# Altium PCB board.PcbDoc
Units mm, origin at the board's own origin, x right, y up, seen from the top; angles counter-clockwise.
Board outline 40 x 69 mm, 4 copper layers (Top Layer, Ground, Power, Bottom Layer), stack 0.778 mm thick; 96 components, 59 nets, 352 pads, 234 vias.
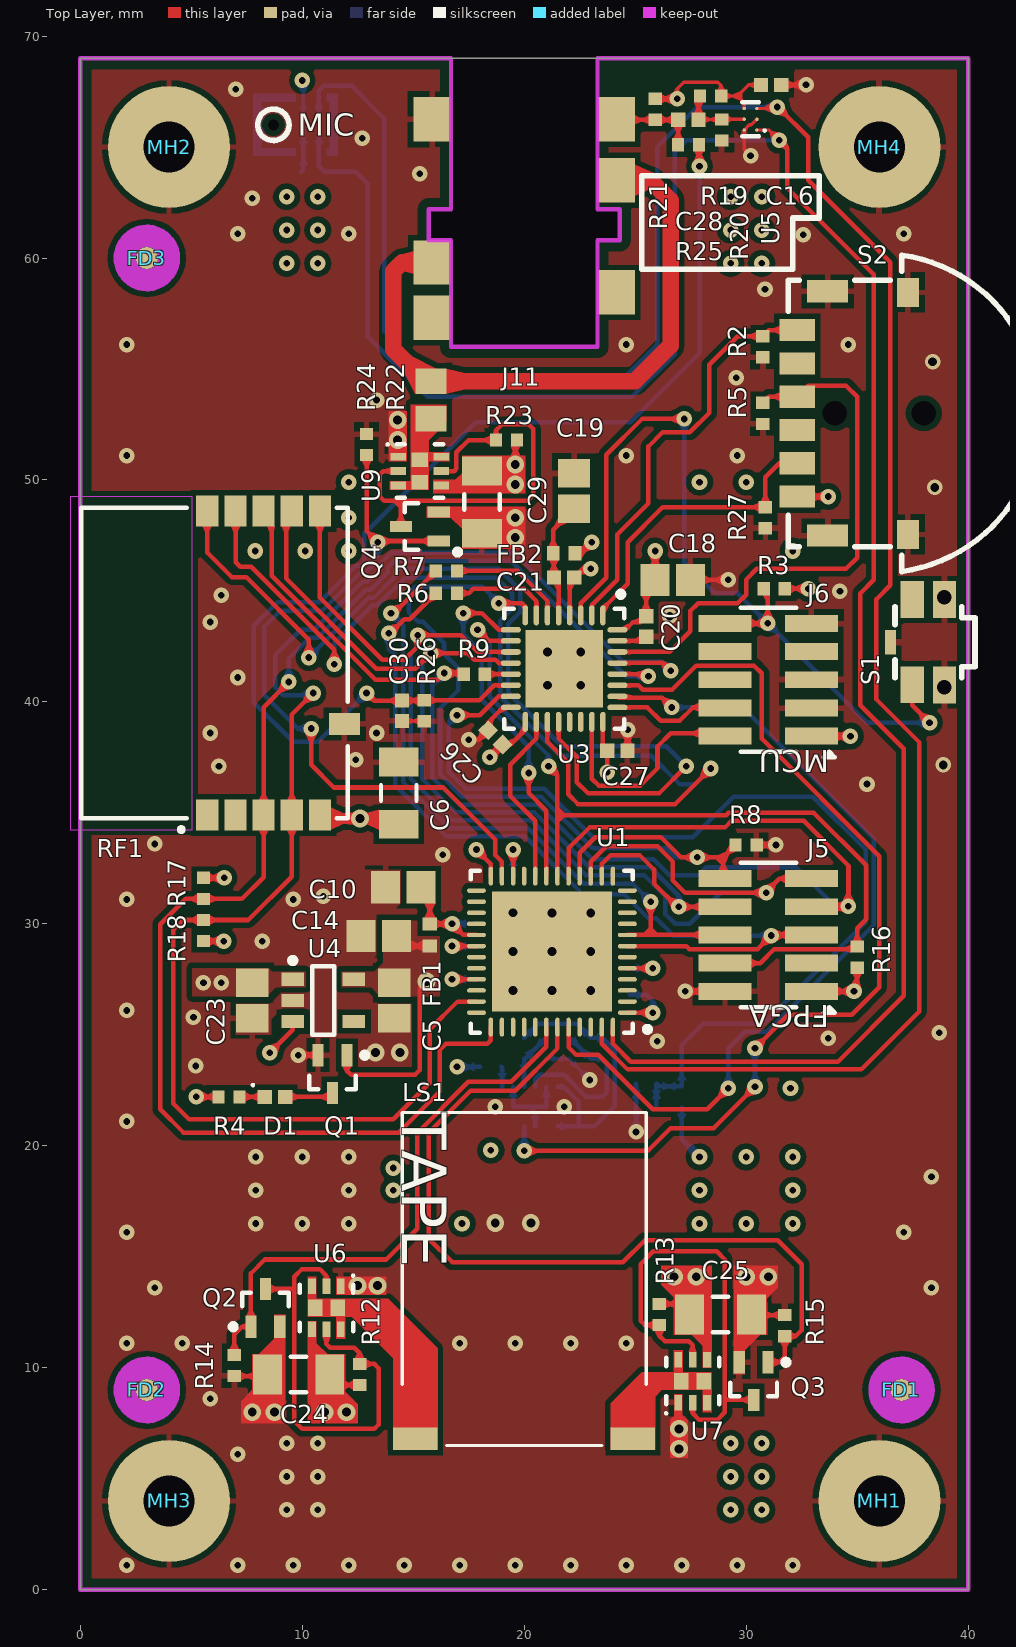
[diagram p0: Top Layer view]
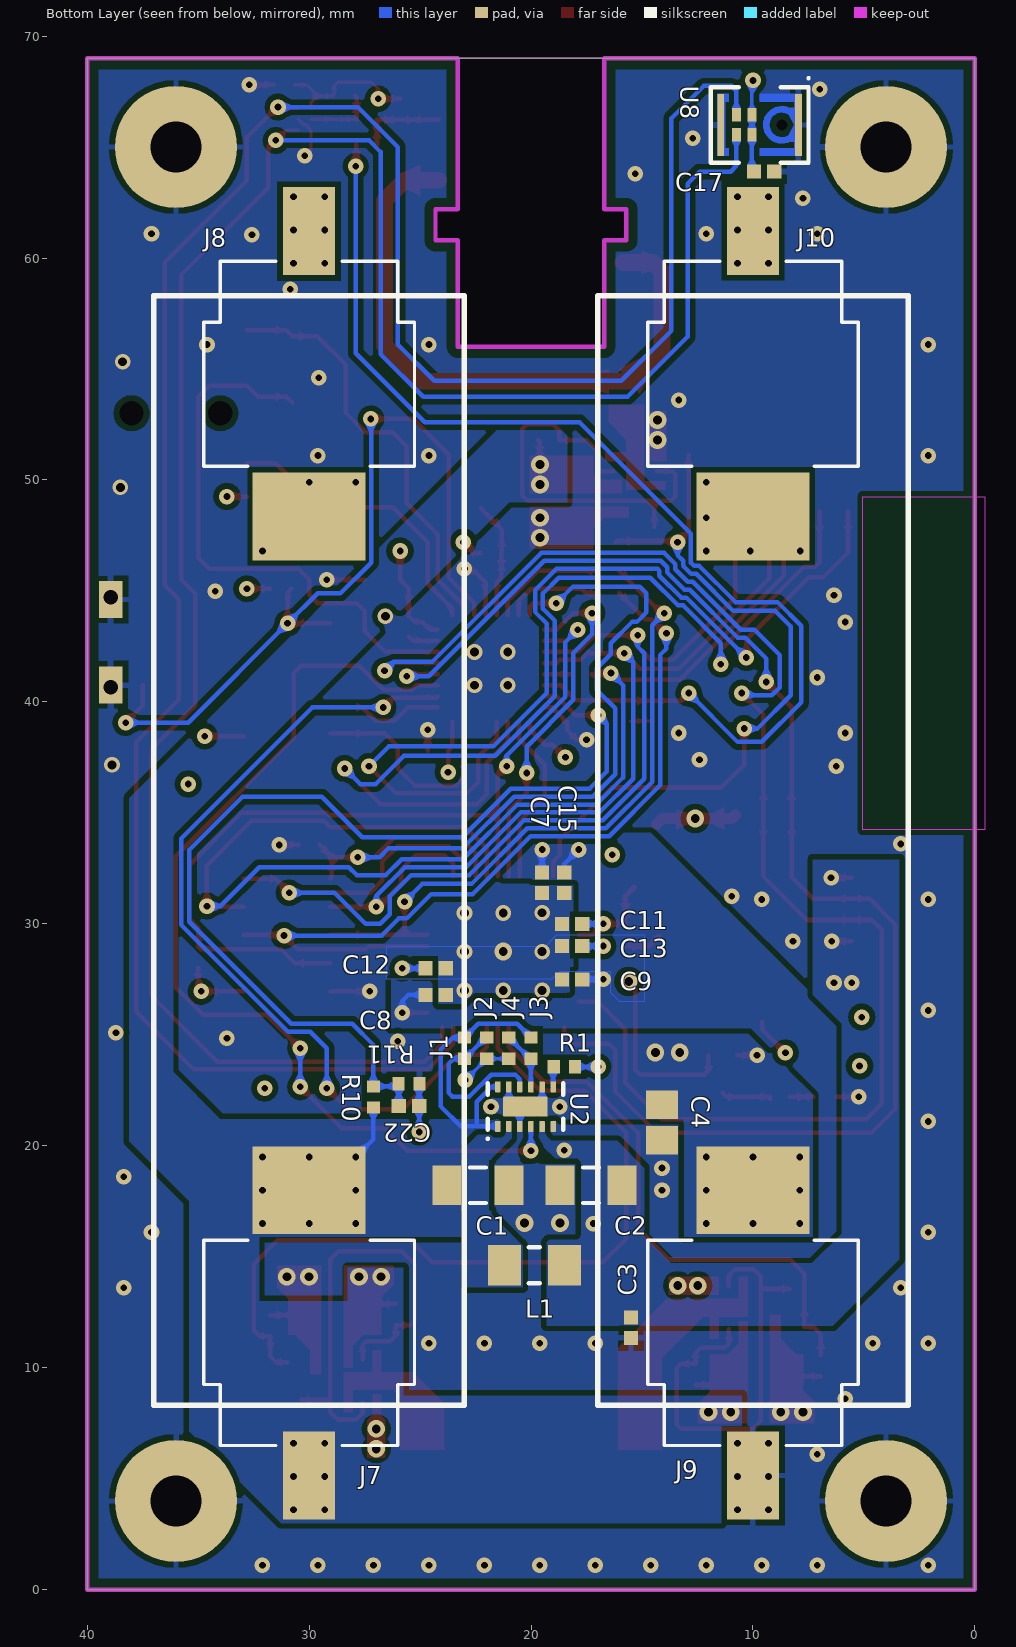
[diagram p1: Bottom Layer view, seen from below]
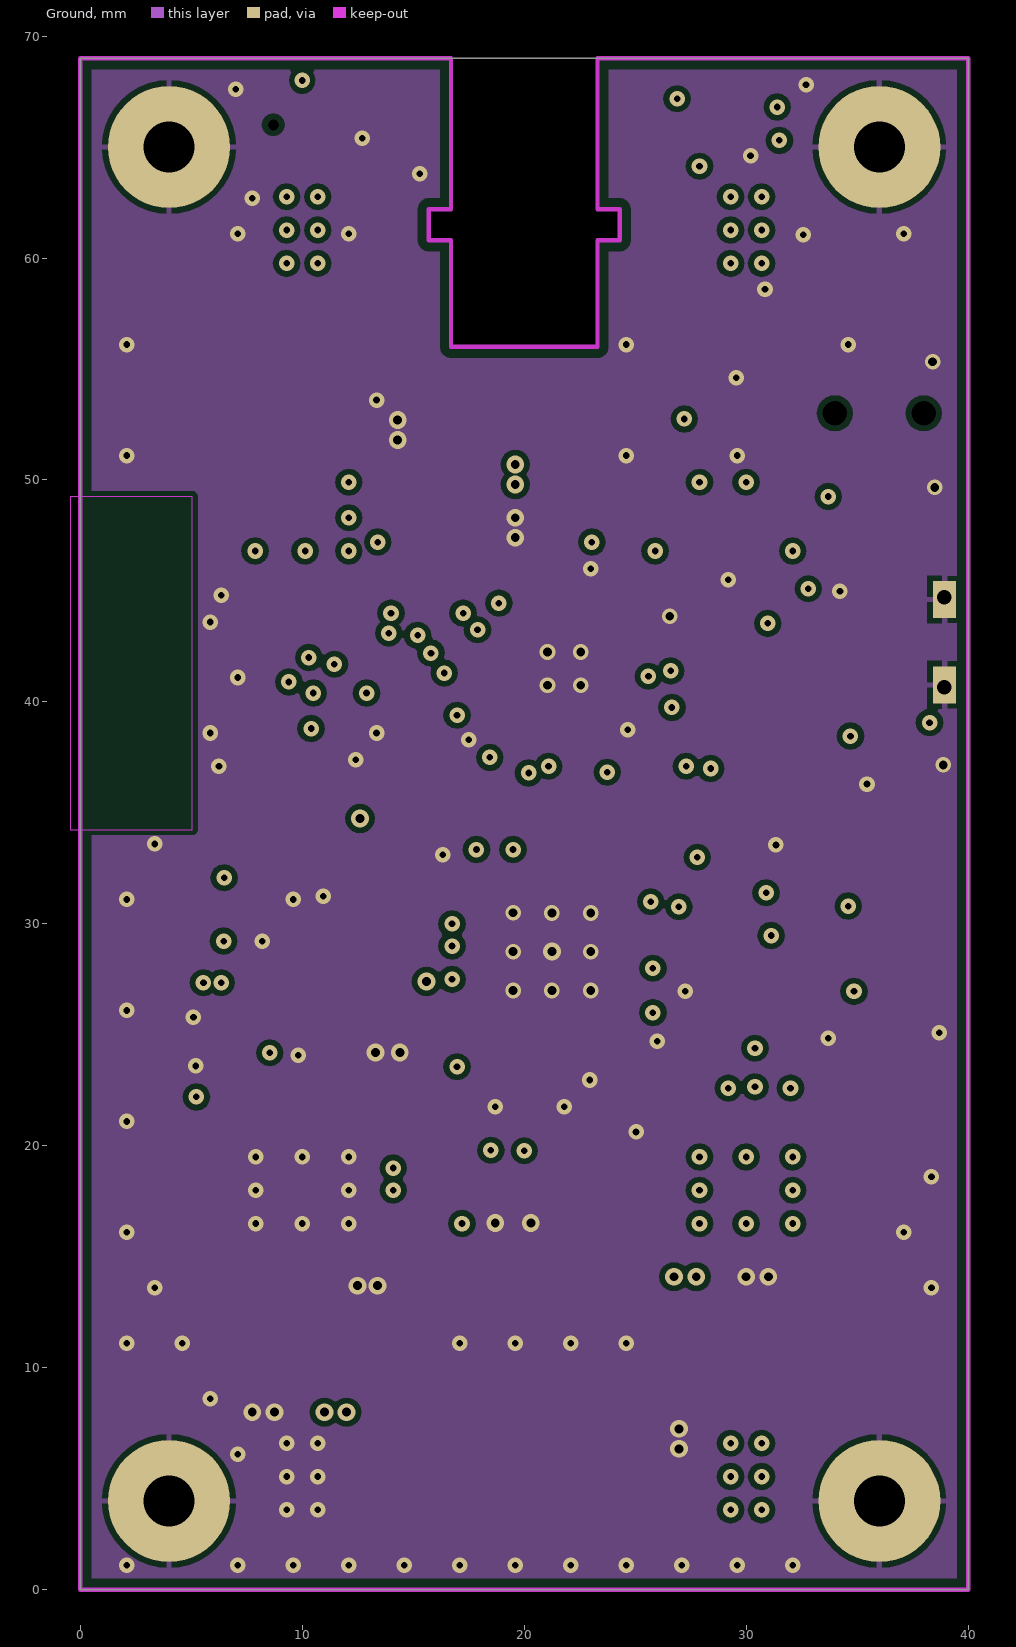
[diagram p2: Ground]
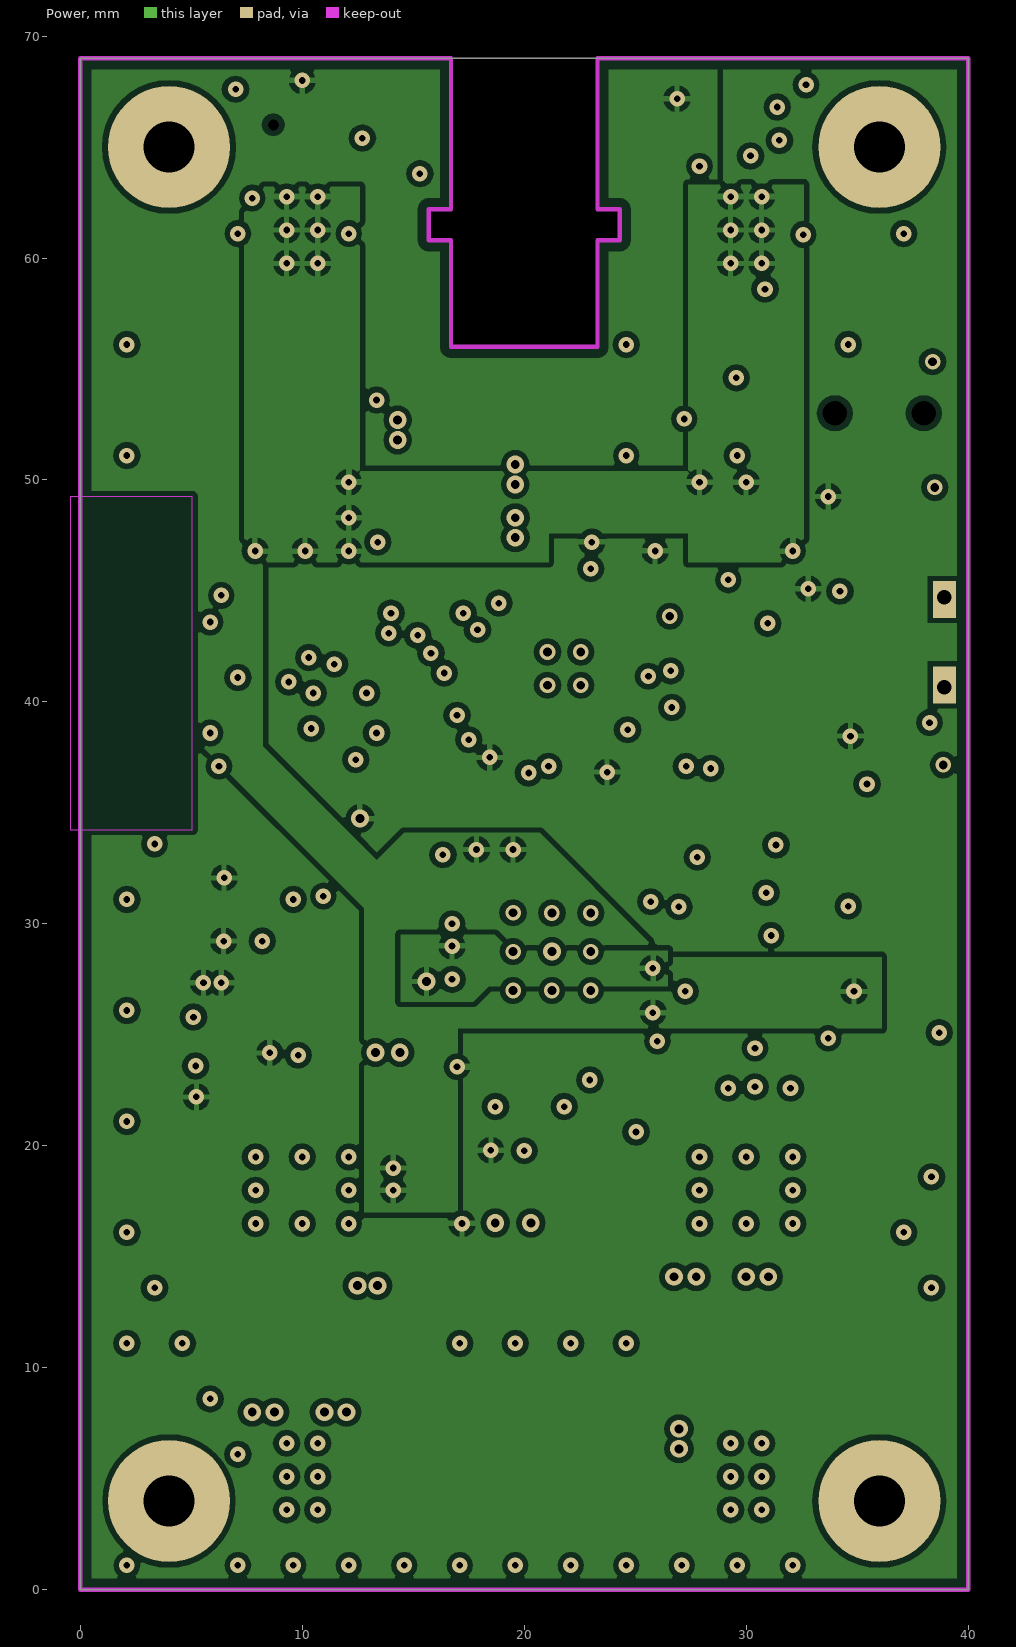
[diagram p3: Power]
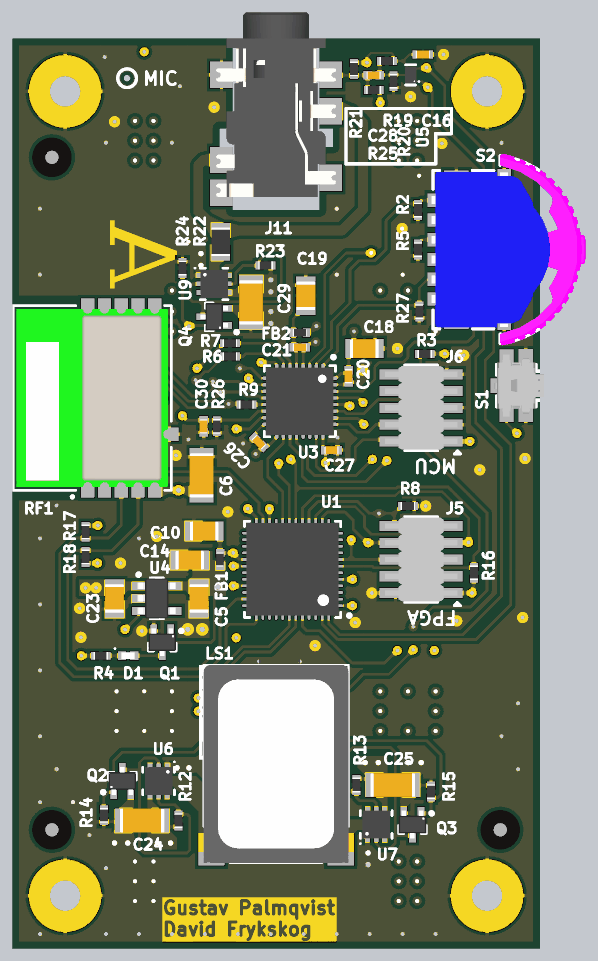
[diagram p4: 3D render of the assembled board from above, using the file's embedded part models]
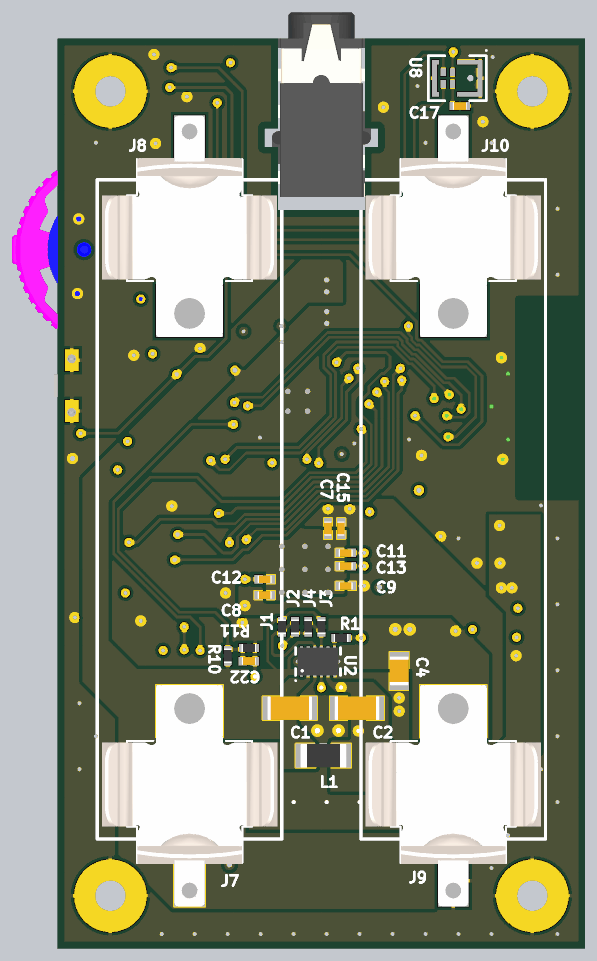
[diagram p5: 3D render of the assembled board from below, using the file's embedded part models]

## Layer stack, top to bottom
Top Solder: solder mask 0.0102, Solder Resist, Dk 3.5
Top Layer: signal copper 0.0356
Dielectric 1: core 0.254, FR-4, Dk 4.2
Ground: signal copper 0.036
Dielectric 3: prepreg 0.127, Dk 4.2
Power: signal copper 0.036
Dielectric 2: core 0.254, Dk 4.2
Bottom Layer: signal copper 0.0356
Bottom Solder: solder mask 0.0102, Solder Resist, Dk 3.5

## Board outline
0,0 0,69 40,69 40,0
cut-out: 106,92
cut-out: 100,94

## Design rules (kind name [scope] priority, off if disabled: settings)
BoardOutlineClearance BoardOutlineClearance_Overlay [OnLayer('Top Overlay') or OnLayer('Bottom Overlay')] p1: gap=0 ignorepadtopadclearanceinfootprint=FALSE
BoardOutlineClearance BoardOutlineClearance_J11 [InComponent('J11')] p2: gap=0 ignorepadtopadclearanceinfootprint=FALSE
BoardOutlineClearance [All] p3: gap=0.508 ignorepadtopadclearanceinfootprint=FALSE
Clearance Clearance_J11 [InComponent('J11') vs IsBoardOutline or IsBoardCutoutRegion] p1: gap=0 ignorepadtopadclearanceinfootprint=FALSE
Clearance "Stitching GND" [IsStitchingVia and InNet('GND') vs (IsVia and (Not IsStitchingVia)) Or IsPad] p2: gap=0.254 ignorepadtopadclearanceinfootprint=FALSE
Clearance Clearance_Polygon [InPolygon] p3: gap=0.254 ignorepadtopadclearanceinfootprint=FALSE
Clearance [All] p4: gap=0.152 ignorepadtopadclearanceinfootprint=FALSE
ComponentClearance ComponentClearance_bat [InComponent('J9') or InComponent('J10') or InComponent('J7') or InComponent('J8')] p1: gap=-5 collisioncheckmode=3 verticalgap=-5 showdistances=FALSE
ComponentClearance [All] p2: gap=0.254 collisioncheckmode=3 verticalgap=0.254 showdistances=FALSE
DiffPairsRouting [All] p1: maxlimit=0.254 minlimit=0.152 mostfreqgap=0.203 toplayer_minwidth=0.152 toplayer_maxwidth=0.381 toplayer_prefwidth=0.152 midlayer1_minwidth=0.152 midlayer1_maxwidth=0.381 midlayer1_prefwidth=0.152 midlayer2_minwidth=0.152 midlayer2_maxwidth=0.381 midlayer2_prefwidth=0.152 bottomlayer_minwidth=0.152 bottomlayer_maxwidth=0.381 bottomlayer_prefwidth=0.152 maxuncoupledlength=12.7
MinimumSolderMaskSliver [All] p1: minsoldermaskwidth=0
PolygonConnect PolygonConnect_1 [IsVia and InNet('GND') vs IsPolygon] p1: connectstyle=Direct reliefconductorwidth=0.254 reliefentries=4 polygonreliefangle="90 Angle" airgapwidth=0.254
PolygonConnect PolygonConnect_Power [InPolygonClass('Power')] p2: thpad.connectstyle=Relief thpad.reliefconductorwidth=0.254 thpad.reliefentries=4 thpad.polygonreliefangle="90 Angle" thpad.airgapwidth=0.254 smdpad.connectstyle=Direct smdpad.reliefconductorwidth=0.254 smdpad.reliefentries=4 smdpad.polygonreliefangle="90 Angle" smdpad.airgapwidth=0.254 via.connectstyle=Direct via.reliefconductorwidth=0.254 via.reliefentries=4 via.polygonreliefangle="90 Angle" via.airgapwidth=0.254
PolygonConnect [All] p3: connectstyle=Relief reliefconductorwidth=0.254 reliefentries=4 polygonreliefangle="90 Angle" airgapwidth=0.254
RoutingVias [All] p1: holewidth=0.3 width=0.7 viastyle="Through Hole" minholewidth=0.3 minwidth=0.6 maxholewidth=1 maxwidth=5
ShortCircuit ShortCircuit_J11 [InComponent('J11') vs IsBoardCutoutRegion] p1: allowed=TRUE
ShortCircuit [All] p2: allowed=FALSE
SilkToSilkClearance [All] p1: silktosilkclearance=0.1
SilkToSolderMaskClearance [IsPad] p1: minsilkscreentomaskgap=0 clearancetoexposedcopper=TRUE
SolderMaskExpansion [All] p1: expansion=0.075
Width [All] p1: maxlimit=2.54 minlimit=0.152 preferedwidth=0.203
24 further rules are at their usual default settings.

## Classes and differential pairs
polygon class Power: GND_L01_P098 GND_L04_P066 GND_L04_P078 GND_L04_P080 NETL1_1_L04_P038 VAUX_1V8_L04_P086 VIN_4V2_L04_P064 VSYS_1V2_L01_P088 VSYS_1V8_L01_P090 VSYS_1V8_L04_P082
component class RADIO: C6 R17 R18 RF1
component class POWER: C1 C2 C3 C4 C5 C22 C23 D1 FD1 FD2 FD3 J1 J2 J3 J4 J7 J8 J9 J10 L1 MH1 MH2 MH3 MH4 Q1 R1 R4 R10 R11 U2 U4
component class MCU: C18 C19 C20 C21 C26 C27 FB2 J6 R2 R3 R5 R9 R27 S1 S2 U3
component class FPGA: C7 C8 C9 C10 C11 C12 C13 C14 C15 FB1 J5 R6 R7 R8 R16 U1
component class AUDIO: C16 C17 C24 C25 C28 C29 C30 J11 LS1 Q2 Q3 Q4 R12 R13 R14 R15 R19 R20 R21 R22 R23 R24 R25 R26 U5 U6 U7 U8 U9
differential pair USB: +USB_P -USB_N

## Components (designator, comment, footprint, x,y, rotation, side; value= is the part's Value field where it differs from the comment)
C1 "cap" CAPC3216X14N 22.4,18.225 r0 bottom value=10u
C2 "cap" CAPC3216X14N 17.3,18.225 r180 bottom value=10u
C3 "cap" CAPC1005X06N 15.5,11.8 r90 bottom value=100n
C4 "cap" CAPC2012X11N 14.1,21.05 r270 bottom value=1u
C5 "cap" CAPC2012X11N 14.15,26.55 r90 top value=1u
C6 "cap" CAPC3216X14N 14.349,35.888 r90 top value=10u
C7 "cap" CAPC1005X06N 19.5,31.85 r90 bottom value=100n
C8 "cap" CAPC1005X06N 24.3,26.8 r0 bottom value=100n
C9 "cap" CAPC1005X06N 18.15,27.5 r180 bottom value=100n
C10 "cap" CAPC2012X11N 14.55,31.65 r0 top value=4u7
C11 "cap" CAPC1005X06N 18.15,30 r180 bottom value=100n
C12 "cap" CAPC1005X06N 24.3,28 r180 bottom value=100n
C13 "cap" CAPC1005X06N 18.15,29 r0 bottom value=100n
C14 "cap" CAPC2012X11N 13.45,29.45 r0 top value=4u7
C15 "cap" CAPC1005X06N 18.5,31.85 r90 bottom value=100n
C16 "cap" CAPC1005X06N 31.127,67.8 r180 top value=100n
C17 "cap" CAPC1005X06N 9.5,63.894 r0 bottom value=100n
C18 "cap" CAPC2012X11N 26.7,45.5 r180 top value=4u7
C19 "cap" CAPC2012X11N 22.25,49.5 r270 top value=1u
C20 "cap" CAPC1005X06N 25.5,43.4 r270 top value=100n
C21 "cap" CAPC1005X06N 21.8,45.6 r0 top value=100n
C22 "cap" CAPC1005X06N 25.5,21.8 r0 bottom value=100n
C23 "cap" CAPC2012X11N 7.75,26.55 r90 top value=1u
C24 "cap" CAPC3216X14N 9.84,9.7 r180 top value=1u
C25 "cap" CAPC3216X14N 28.842,12.4 r180 top value=1u
C26 "cap" CAPC1005X06N 18.7,38.4 r135 top value=100n
C27 "cap" CAPC1005X06N 24.2,37.8 r0 top value=100n
C28 "cap" CAPC1005X06N 27.4,66.225 r180 top value=100n
C29 "cap" CAPC3216X14N 18.1,49 r90 top value=1u
C30 "cap" CAPC1005X06N 14.5,39.6 r90 top value=10n
D1 "led" CAPCP1005X06N 8.772,22.204 r0 top value=RED
FB1 "ferrite" INDC1005X06N 15.75,29.5 r90 top value=100R
FB2 "ferrite" INDC1005X06N 21.8,46.7 r0 top value=100R
FD1 "Fiducial" FIDUCIAL_1_3 37,9 r0 top
FD2 "Fiducial" FIDUCIAL_1_3 3,9 r0 top
FD3 "Fiducial" FIDUCIAL_1_3 3,60 r0 top
J1 "res" RESC1005X04N 23,24.4 r90 bottom value=0R
J2 "res" RESC1005X04N 22,24.4 r90 bottom value=0R
J3 "res" RESC1005X04N 20,24.4 r90 bottom value=0R
J4 "res" RESC1005X04N 21,24.4 r90 bottom value=0R
J5 "iCE40 Prog" hdr_2x5_50mil 31,29.5 r90 top
J6 "SWD" hdr_2x5_50mil 31,41 r90 top
J7 "53" ke53 30,18 r270 bottom locked
J8 "53" ke53 30,48.36 r90 bottom locked
J9 "53" ke53 10,18 r270 bottom locked
J10 "53" ke53 10,48.36 r90 bottom locked
J11 "SJ-43504-SMT-TR" SJ-43504-SMT-TR 20.004,69 r270 top locked
L1 "ind" INDC3216X20N 19.85,14.625 r180 bottom value=100u
LS1 "CMS-15113-078S" cms-15113-078s 20,14 r0 top
MH1 "M2" mount_m2l 36,4 r0 top
MH2 "M2" mount_m2l 4,65 r0 top locked
MH3 "M2" mount_m2l 4,4 r0 top
MH4 "M2" mount_m2l 36,65 r0 top locked
Q1 "RU1J002YN" SOTFL65P210X105-3N 11.363,23.233 r270 top
Q2 "RU1J002YN" SOTFL65P210X105-3N 8.34,12.7 r90 top
Q3 "RU1J002YN" SOTFL65P210X105-3N 30.342,9.4 r270 top
Q4 "RU1J002YN" SOTFL65P210X105-3N 15.3,47.9 r180 top
R1 "res" RESC1005X04N 18.5,23.563 r180 bottom value=10K
R2 "res" RESC1005X04N 30.75,56 r90 top value=47K
R3 "res" RESC1005X04N 31.27,45.1 r0 top value=47K
R4 "res" RESC1005X04N 6.705,22.204 r180 top value=1K
R5 "res" RESC1005X04N 30.75,53 r90 top value=47K
R6 "res" RESC1005X04N 16.496,44.9 r0 top value=1K
R7 "res" RESC1005X04N 16.496,45.9 r0 top value=1K
R8 "res" RESC1005X04N 30,33.556 r180 top value=47K
R9 "res" RESC1005X04N 17.75,41.25 r180 top value=10K
R10 "res" RESC1005X04N 27.1,22.2 r270 bottom value=270K
R11 "res" RESC1005X04N 25.5,22.8 r0 bottom value=100K
R12 "res" RESC1005X04N 12.59,9.7 r270 top value=1K
R13 "res" RESC1005X04N 26.092,12.4 r90 top value=1K
R14 "res" RESC1005X04N 6.94,10.1 r90 top value=10K
R15 "res" RESC1005X04N 31.742,11.9 r270 top value=10K
R16 "res" RESC1005X04N 35,28.5 r270 top value=47K
R17 "res" RESC1005X04N 5.55,31.6 r90 top value=10K
R18 "res" RESC1005X04N 5.55,29.7 r270 top value=10K
R19 "res" RESC1005X04N 28.4,67.3 r0 top value=1M2
R20 "res" RESC1005X04N 28.9,65.765 r90 top value=100K
R21 "res" RESC1005X04N 25.9,66.7 r270 top value=2K2
R22 "res" RESC2012X06N 15.8,53.6 r90 top value=10R
R23 "res" RESC1005X04N 19.2,51.8 r0 top value=1K
R24 "res" RESC1005X04N 12.9,51.6 r270 top value=10K
R25 "res" RESC1005X04N 27.4,65.1 r0 top value=220K
R26 "res" RESC1005X04N 15.5,39.6 r270 top value=390K
R27 "res" RESC1005X04N 30.866,48.3 r90 top value=47K
RF1 "SPSGRF-868" spsgrf 6.05,41.75 r90 top
S1 "PTS840ESDPKSMTRLFS" PCBComponent_1 38.21,42.69 r90 top
S2 "SLLB120300" sllb120300 36,53 r270 top
U1 "iCE40UP5K" QFN127P600-8N-ICE40UP5K 21.25,28.75 r180 top locked
U2 "TPS62740DSSR" SON50P200X80_HS-13N 20.254,21.768 r90 bottom
U3 "STM32L082KBU6" QFN50P500X500X60_HS-33N 21.8,41.5 r270 top locked
U4 "TPS7A0512" SOT95P280X145-5N 10.95,26.55 r0 top
U5 "FAN3850AUC16X" BGA6C48P2X3_86X126X30 30.2,66.25 r180 top
U6 "SSM6L61NU,LF" SON65P200X80_HS-7N 11.09,12.7 r270 top
U7 "SSM6L61NU,LF" SON65P200X80_HS-7N 27.592,9.4 r90 top
U8 "INMP621" SON70P300X90-4N 9.7,66 r0 bottom
U9 "SSM6L61NU,LF" SON65P200X80_HS-7N 15.3,50.4 r0 top

## Footprints (in the part's own frame and the unit in brackets; to place one, negate y for a bottom-side part, rotate by r counter-clockwise, add the part's x,y. Pads: shape width x height; smd on the part's side, far side on the other; paste and mask are expansions set on the pad)
BGA6C48P2X3_86X126X30 [mm] "BGA, 6-Leads, Body 0,86x1,26mmx0,30mm, Pitch 0,49mm"
  round 0.15 smd mask+0.05: A1(-0.285,0.485) A2(0.285,0.485) B1(-0.285,0) B2(0.285,0) C1(-0.285,-0.485) C2(0.285,-0.485)
  silkscreen extent -0.68,-0.76 0.38,0.76, body extent -0.43,-0.63 0.43,0.63, height 0.3
CAPC1005X06N [mm] "Chip Capacitor, 2-Leads, Body 1.00x0.50mm, IPC Medium Density"
  rect 0.64x0.64 smd: 1(-0.46,0) 2(0.46,0)
  body extent -0.55,-0.3 0.55,0.3, height 0.6
CAPC2012X11N [mm] "Chip Capacitor, 2-Leads, Body 2.00x1.25mm, IPC Medium Density"
  rect 1.3x1.45 smd: 1(-0.8,0) 2(0.8,0)
  body extent -1.1,-0.72 1.1,0.72, height 1.1
CAPC3216X14N [mm] "Chip Capacitor, 2-Leads, Body 3.20x1.60mm, IPC Medium Density"
  rect 1.3x1.8 smd: 1(-1.4,0) 2(1.4,0)
  silkscreen extent -0.35,-0.8 0.35,0.8, body extent -1.7,-0.9 1.7,0.9, height 1.35
CAPCP1005X06N [mm] "Chip Capacitor, 2-Leads, Body 1.00x0.50mm, IPC Medium Density"
  rect 0.64x0.64 smd: 1(-0.46,0) 2(0.46,0)
  silkscreen extent -1.04,0.48 -0.94,0.58, body extent -0.5,-0.25 0.5,0.25, height 0.5
cms-15113-078s [mm]
  rect 2x1 smd: 1(-4.9,-7.2) 2(4.9,-7.2)
  Top Layer region: 3.9,-7.7 3.9,-6.1 4.7,-5.3 5.9,-5.3 5.9,-7.7
  Top Layer region: -3.9,-7.7 -3.9,-6.1 -4.7,-5.3 -5.9,-5.3 -5.9,-7.7
  silkscreen extent -5.5,-7.5 5.5,7.5, body extent -5.5,-7.5 5.5,7.5, height 3.2
FIDUCIAL_1_3 [mm]
  round 1 smd mask+1: 0(0,0)
  Top Layer keep-out circle w1: c0,0 r1
hdr_2x5_50mil [mm] "2x5 Pin header, 50mil pitch"
  rect 0.76x2.4 smd: 1(-2.54,-1.95) 2(-2.54,1.95) 2(-2.54,1.95) 3(-1.27,-1.95) 4(-1.27,1.95) 5(0,-1.95) 6(0,1.95) 7(1.27,-1.95) 8(1.27,1.95) 9(2.54,-1.95) 10(2.54,1.95)
  silkscreen extent -3.5,-3 3.25,1.25, body extent -3.17,-2.75 3.18,2.75, height 4.5
INDC1005X06N [mm] "Chip Inductor, 2-Leads, Body 1.00x0.50mm, IPC Medium Density"
  rect 0.58x0.64 smd: 1(-0.49,0) 2(0.49,0)
  body extent -0.55,-0.3 0.55,0.3, height 0.6
INDC3216X20N [mm] "Chip Inductor, 2-Leads, Body 3.20x1.60mm, IPC Medium Density"
  rect 1.49x1.82 smd: 1(-1.355,0) 2(1.355,0)
  silkscreen extent -0.25,-0.81 0.25,0.81, body extent -1.75,-0.9 1.75,0.9, height 2
ke53 [mm]
  rect 3.96x5.08 smd: 1(0,0)
  rect 3.96x2.34 smd: 1(12.85,0)
  silkscreen extent 2.25,-4.75 11.5,4.75, body extent -2,-6.65 14.8,6.65, height 15.64
mount_m2l [mm] "M2, washer, loose fit"
  round 5.5 hole 2.3: 1(0,0)
PCBComponent_1 [mm]
  rect 1.65x1.05 smd: 1(-1.924,0.725) 2(1.925,0.725)
  rect 1.65x1.05 hole 0.65 copper offset 0.1,0 paste+0: 3(-2.025,-0.725)
  rect 1.65x1.05 hole 0.65 copper offset -0.1,0 paste+0: 4(2.025,-0.725)
  rect 1.1x0.5 smd: 5(0,1.7)
  silkscreen extent -1.6,-2.1 1.6,1.5, body extent -2.35,-2.1 2.35,1.65, height 1.4
QFN50P500X500X60_HS-33N [mm] "QFN, 32-Leads, Body 5,00x5,00mm, Pitch 0,50mm, Thermal Pad 3,50x3,50mm, IPC Medium Density"
  oval 0.9x0.25 smd: 1(-2.4,1.75) 2(-2.4,1.25) 3(-2.4,0.75) 4(-2.4,0.25) 5(-2.4,-0.25) 6(-2.4,-0.75) 7(-2.4,-1.25) 8(-2.4,-1.75) 17(2.4,-1.75) 18(2.4,-1.25) 19(2.4,-0.75) 20(2.4,-0.25) 21(2.4,0.25) 22(2.4,0.75) 23(2.4,1.25) 24(2.4,1.75)
  oval 0.25x0.9 smd: 9(-1.75,-2.4) 10(-1.25,-2.4) 11(-0.75,-2.4) 12(-0.25,-2.4) 13(0.25,-2.4) 14(0.75,-2.4) 15(1.25,-2.4) 16(1.75,-2.4) 25(1.75,2.4) 26(1.25,2.4) 27(0.75,2.4) 28(0.25,2.4) 29(-0.25,2.4) 30(-0.75,2.4) 31(-1.25,2.4) 32(-1.75,2.4)
  rect 3.5x3.5 smd: 33(0,0)
  silkscreen extent -3.47,-2.7 2.7,2.7, body extent -2.56,-2.56 2.56,2.56, height 0.6
QFN127P600-8N-ICE40UP5K [mm]
  oval 0.85x0.2 smd: 1(-3.4,2.75) 2(-3.4,2.25) 3(-3.4,1.75) 4(-3.4,1.25) 5(-3.4,0.75) 6(-3.4,0.25) 7(-3.4,-0.25) 8(-3.4,-0.75) 9(-3.4,-1.25) 10(-3.4,-1.75) 11(-3.4,-2.25) 12(-3.4,-2.75) 25(3.4,-2.75) 26(3.4,-2.25) 27(3.4,-1.75) 28(3.4,-1.25) 29(3.4,-0.75) 30(3.4,-0.25) 31(3.4,0.25) 32(3.4,0.75) 33(3.4,1.25) 34(3.4,1.75) 35(3.4,2.25) 36(3.4,2.75)
  oval 0.2x0.85 smd: 13(-2.75,-3.4) 14(-2.25,-3.4) 15(-1.75,-3.4) 16(-1.25,-3.4) 17(-0.75,-3.4) 18(-0.25,-3.4) 19(0.25,-3.4) 20(0.75,-3.4) 21(1.25,-3.4) 22(1.75,-3.4) 23(2.25,-3.4) 24(2.75,-3.4) 37(2.75,3.4) 38(2.25,3.4) 39(1.75,3.4) 40(1.25,3.4) 41(0.75,3.4) 42(0.25,3.4) 43(-0.25,3.4) 44(-0.75,3.4) 45(-1.25,3.4) 46(-1.75,3.4) 47(-2.25,3.4) 48(-2.75,3.4)
  rect 5.4x5.4 smd: 49(0,0)
  silkscreen extent -4.43,-3.65 3.65,3.65, body extent -3.5,-3.5 3.5,3.5, height 1
RESC1005X04N [mm] "Chip Resistor, 2-Leads, Body 1.05x0.54mm, IPC Medium Density"
  rect 0.55x0.6 smd: 1(-0.475,0) 2(0.475,0)
  body extent -0.55,-0.3 0.55,0.3, height 0.4
RESC2012X06N [mm] "Chip Resistor, 2-Leads, Body 2.00x1.25mm, IPC Medium Density"
  rect 1.15x1.4 smd: 1(-0.85,0) 2(0.85,0)
  body extent -1.07,-0.7 1.07,0.7, height 0.65
SJ-43504-SMT-TR [mm]
  rect 2x1.7 smd: 1(2.75,4.15) 2(9.2,-4.15) 3(5.5,4.15) 4(2.75,-4.15) 5(11.7,-4.15) 6(10.55,4.15)
  Keep-Out Layer board cut-out: 0,3.3 6.8,3.3 6.8,4.3 8.2,4.3 8.2,3.3 13,3.3 13,-3.3 8.2,-3.3 8.2,-4.3 6.8,-4.3 6.8,-3.3 0,-3.3
  body extent -2,-4.55 12,4.55, height 1.9
sllb120300 [mm]
  rect 1x1.6 smd: 1(-3.75,-3.7) 2(-2.25,-3.7) 3(0.75,-3.7) 4(2.25,-3.7) C(3.75,-3.7) T(-0.75,-3.7)
  rrect100% 0x0 hole 1.1 unplated: MNT(0,2) MNT(0,-2)
  rect 1x1.85 smd: SHD(-5.5,-2.325) SHD(5.5,-2.325)
  rect 1.3x1 smd: SHD(-5.45,1.3) SHD(5.45,1.3)
  silkscreen extent -7.13,-4.1 7.13,7.2, body extent -7.26,-4.21 7.26,7.48, height 2.98
SON50P200X80_HS-13N [mm] "SON, 12-Leads, Body 3,00x2,00mm, Pitch 0,50mm, Thermal Pad 2,00x0,48mm, IPC Medium Density"
  rrect30% 0.5x0.25 smd: 1(-0.89,1.25) 2(-0.89,0.75) 3(-0.89,0.25) 4(-0.89,-0.25) 5(-0.89,-0.75) 6(-0.89,-1.25) 7(0.89,-1.25) 8(0.89,-0.75) 9(0.89,-0.25) 10(0.89,0.25) 11(0.89,0.75) 12(0.89,1.25)
  rrect10% 0.9x2 smd: 13(0,0)
  silkscreen extent -1.5,-1.7 1.05,1.75, body extent -1.05,-1.55 1.05,1.55, height 0.8
SON65P200X80_HS-7N [mm] "SON, 6-Leads, Body 2,00x2,00mm, Pitch 0,65mm, Thermal Pad 0,65x0,74mm, IPC Medium Density"
  rect 0.7x0.35 smd: 1(-0.97,0.65) 2(-0.97,0) 3(-0.97,-0.65) 4(0.97,-0.65) 5(0.97,0) 6(0.97,0.65)
  rect 0.74x0.65 smd: 7(0,0.508) 8(0,-0.508)
  silkscreen extent -1.5,-1.2 1.05,1.25, body extent -1.05,-1.05 1.05,1.05, height 0.8
SON70P300X90-4N [mm] "SON, 4-Leads, Body 4,00x3,00mm, Pitch 0,70mm, IPC Medium Density"
  round 0 hole 0.5 unplated: 0(-1,0)
  rect 0.4x0.6 smd: 1(1.05,0.45) 2(0.35,0.45) 4(0.35,-0.45) 5(1.05,-0.45)
  rect 0.3x2.8 smd: 3(-1.75,0) 3(1.75,0)
  Top Layer circle w0.3: c-1,0 r0.7
  Top Layer region: 1.4,-1.4 1.4,-1.05 1.55,-1.05 1.55,1.05 1.4,1.05 1.4,1.4 1.9,1.4 1.9,-1.4
  Top Layer region: 0,-1.4 -1.9,-1.4 -1.9,1.4 0,1.4 0,1.05 -1.55,1.05 -1.55,-1.05 0,-1.05
  silkscreen extent -2.25,-2.15 2.2,1.7, body extent -2,-1.5 2,1.5, height 1
SOT95P280X145-5N [mm] "SOT23, 5-Leads, Body 2,90x2,80mm, Pitch 0,95mm, IPC Medium Density"
  rect 1x0.6 smd: 1(-1.375,0.95) 2(-1.375,0) 3(-1.375,-0.95) 4(1.375,-0.95) 5(1.375,0.95)
  silkscreen extent -1.5,-1.55 0.5,1.92, body extent -1.47,-1.52 1.47,1.53, height 1.45
SOTFL65P210X105-3N [mm] "SOTFL, 3-Leads, Body 2,00x2,10mm, Pitch 0,65mm, IPC Medium Density"
  rect 1x0.5 smd: 1(-0.85,0.65) 2(-0.85,-0.65) 3(0.85,0)
  silkscreen extent -0.97,-1.05 0.67,1.58, body extent -1.05,-1.05 1.05,1.05, height 1.05
spsgrf [mm]
  rect 1.4x1 smd: 1(-6.85,0.33) 2(-6.85,-0.94) 3(-6.85,-2.21) 4(-6.85,-3.48) 5(-6.85,-4.75) 7(6.85,-4.75) 8(6.85,-3.48) 9(6.85,-2.21) 10(6.85,-0.94) 11(6.85,0.33)
  rect 1x1.4 smd: 6(-2.75,-5.85)
  Keep-Out Layer region: -7.5,1 7.5,1 7.5,6.5 -7.5,6.5
  silkscreen extent -7.6,-6 7,6, body extent -6.75,-5.75 6.75,5.75, height 5

## Part data
C1 C2 C3 C4 C5 C6 C7 C8 C9 C10 C11 C12 C13 C14 C15 C16 C17 C18 C19 C20 C21 C22 C23 C24 C25 C26 C27 C28 C29 C30: "Capacitor"
  C7 C8 C9 C11 C12 C13 C15 C20 C21 C26 C27: type=X7R
  C10 C14 C18 C19: type=X5R
D1: "LED"
FB1 FB2 L1: "Inductor"
FD1 FD2 FD3: library part fiducial
J1 J2 J3 J4 R1 R2 R3 R4 R5 R6 R7 R8 R9 R10 R11 R12 R13 R14 R15 R16 R17 R18 R19 R20 R21 R22 R23 R24 R25 R26 R27: "Resistor"
J5: library part hdr_2x5, "2x5 Header"
J6: library part hdr_swd, "SWD Header"
J7 J8 J9 J10: library part ke53, "Cylindrical Battery Contacts, Clips, Holders & Springs SMT Battery clip FOR AA", ComponentLink1Description=datasheet, ComponentLink1URL=https://www.mouser.se/datasheet/2/215/3-745929.pdf
J11: library part sj-43504-smt-tr, "MID MOUNT AUDIO JACK", ComponentLink1Description=datasheet, ComponentLink1URL=https://www.mouser.se/datasheet/2/670/sj-43504-smt-1391171.pdf
LS1: library part cms-15113-078s, "Speakers & Transducers 0.7W 8ohm 700Hz 15x11mm SpringContct", ComponentLink1Description=datasheet, ComponentLink1URL=https://www.mouser.se/datasheet/2/670/cms-15113-078x-1315382.pdf
MH1 MH2 MH3 MH4: library part mounting_hole, "Mounting hole"
Q1 Q2 Q3 Q4: library part ru1j002yn, "N-channel 50V 200mA Small signal MOSFET", ComponentLink1Description=datasheet, ComponentLink1URL=https://www.mouser.se/datasheet/2/348/ru1j002yn-e-1018335.pdf
RF1: library part spsgrf-868, "Sub-GHz (868 or 915 MHz) low power programmable RF / transceiver modules", ComponentLink1Description=datasheet, ComponentLink1URL=https://www.mouser.se/datasheet/2/389/spsgrf-955290.pdf
S1: library part pts840esdpksmtrlfs, "Microminiature SMT Side Actuated tactile switch", ComponentLink1Description=datasheet, ComponentLink1URL=https://www.mouser.se/datasheet/2/60/pts840-1280343.pdf
S2: library part sllb120300, "Compact and low-profile horizontal type for various applications", ComponentLink1Description=datasheet, ComponentLink1URL=https://www.mouser.se/datasheet/2/15/SLLB-1370969.pdf
U1: library part ice40up5k-sg48, "iCE40 UltraPlus family from Lattice Semiconductor is  / an ultra-low power FPGA and sensor manager  / designed for ultra / - / low power mobile a / pplications, such  / as smartphones, tablets and hand-held devices.", ComponentLink1Description=datasheet, ComponentLink1URL=https://www.mouser.se/datasheet/2/225/iCE40%20UltraPlus%20Family%20Data%20Sheet-1149905.pdf
U2: library part tps62740dssr, "TPS6274x 360nA IQ Step Down Converter For Low Power Applications", Supplier Part Number 1=595-TPS62740DSSR, ComponentLink1Description=datasheet, ComponentLink1URL=http://www.ti.com/general/docs/suppproductinfo.tsp?distId=26&gotoUrl=http%3A%2F%2Fwww.ti.com%2Flit%2Fgpn%2Ftps62740, Supplier 1=Mouser
U3: library part stm32l082kbu6, "Ultra-low-power 32-bit MCU Arm-based Cortex-M0+, up to 192KB / Flash, 20KB SRAM, 6KB EEPROM, USB, ADC, DACs, AES", ComponentLink1Description=datasheet, ComponentLink1URL=https://www.mouser.se/datasheet/2/389/stm32l082kb-956309.pdf
U4: library part tps7a0512pdbvr, "TPS7A05 1-µA Ultralow IQ, 200-mA, Low-Dropout Regulator", Supplier Part Number 1=595-TPS7A0512PDBVR, ComponentLink1Description=datasheet, ComponentLink1URL=http://www.ti.com/lit/ds/symlink/tps7a05.pdf?HQS=TI-null-null-mousermode-df-pf-null-wwe&DCM=yes&ref_url=https%3A%2F%2Fwww.mouser.se%2F, Supplier 1=Mouser
U5: library part fan3850auc16x, "Microphone Pre-Amplifier with Digital Output", Supplier Part Number 1=760-5794, ComponentLink1Description=datasheet, ComponentLink1URL=https://www.mouser.se/datasheet/2/308/FAN3850A-1305296.pdf, Supplier 1=RSComponents, Supplier 2=Mouser, Supplier Part Number 2=512-FAN3850AUC16X
U6 U7 U9: library part ssm6l61nulf, "2 MOSFET in one package. 1 NMOS and one PMOS.", ComponentLink1Description=datasheet, ComponentLink1URL=http://toshiba.semicon-storage.com/ap-en/product/mosfet/detail.SSM6L61NU.html
U8: library part inmp621, "Wide Dynamic Range Microphone with PDM Digital Output", Supplier Part Number 1=410-INMP621ACEZ-R0, ComponentLink1Description=datasheet, ComponentLink1URL=https://www.invensense.com/wp-content/uploads/2015/02/INMP621.pdf, Supplier 1=Mouser

## Via types
v1: diameter 0.7, hole 0.3, Top Layer to Bottom Layer, 82 vias
v2: diameter 0.7, hole 0.3, Top Layer to Bottom Layer, tented top, 56 vias
v3: diameter 0.7, hole 0.3, Top Layer to Bottom Layer, tented both sides, 55 vias
v4: diameter 0.8, hole 0.4, Top Layer to Bottom Layer, tented both sides, 19 vias
v5: diameter 0.704, hole 0.4, Top Layer to Bottom Layer, tented bottom, 12 vias
v6: diameter 0.8, hole 0.4, Top Layer to Bottom Layer, 5 vias
v7: diameter 0.704, hole 0.4, Top Layer to Bottom Layer, 4 vias
v8: diameter 0.8, hole 0.4, Top Layer to Bottom Layer, tented bottom, 1 vias

## Nets (pads, with @x,y where several pads share a name; then routed paths per layer and width w, separated by ;. In a path a pad name is that pad's centre, name@x,y a point inside that pad or via, vN(x,y) a via of type N, cw(c..) or ccw(c..) an arc to the next point about the centre after c; other vN are vias at no path point)
AUX_EN: U2.4 U3.27 | length 44.7
  Top Layer w0.203: v1(20.004,19.778) 25.578,19.778 26.6,20.8 28.542,20.8 v1(30.4,22.658) ; U3.27 25.15,40.75 25.35,40.55 26.661,40.55 27.745,41.634 30.355,41.634 30.7,41.289 30.7,38.35 36,33.05 36,27.137 34.763,25.9 31.9,25.9 v2(30.4,24.4)
  Bottom Layer w0.203: v1(20.004,19.778) U2.4 ; v1(30.4,22.658) v2(30.4,24.4)
CDONE: J5.5 R6.1 U1.7 | length 38.2
  Top Layer w0.203: v2(13.9,43.1) 13.975,43.1 14.604,43.729 14.85,43.729 R6.1 ; U1.7 27.3,29 27.434,28.866 30.52,28.866 v2(31.127,29.473) 31.154,29.5 J5.5
  Bottom Layer w0.203: v2(13.9,43.1) 13.9,42.4 14.189,42.111 14.189,36.245 16.48,33.954 20.023,33.954 22.631,31.346 24.5,31.346 25.6,30.246 25.954,30.246 26.727,29.473 v2(31.127,29.473)
FPGA_ATT: J5.4 R16.1 U1.18 U3.10 | length 39.3
  Top Layer w0.203: v1(17.9,43.25) 18.4,42.75 U3.10 ; v1(21.1,37.1) 21.5,36.7 21.5,34.9 ; U1.18 21.5,34.9 ; J5.4 30.634,28.23 31.27,28.866 34.891,28.866 R16.1 35,29.8 35.406,30.206 35.406,32.639 33.048,34.996 29.197,34.996 29.101,34.9 21.5,34.9
  Bottom Layer w0.203: v1(17.9,43.25) 18.451,42.699 18.451,40.238 21.1,37.589 v1(21.1,37.1)
FPGA_CDONE: R6.2 U3.7 | length 4.5
  Top Layer w0.203: R6.2 17.512,44.9 17.712,45.1 19.997,45.1 20.55,44.547 U3.7
FPGA_CRESET: R7.2 U3.6 | length 5.3
  Top Layer w0.203: R7.2 19.7,45.9 21.05,44.55 U3.6
FPGA_CSS: J5.10 R8.2 U1.16 U3.8 | length 38.8
  Top Layer w0.203: v1(18.86,44.45) 19.9,44.45 20.05,44.3 U3.8 ; U1.16 22.5,33.2 23.2,33.9 26.163,33.9 27.063,33 v2(27.8,33) 28.97,33 ; J5.10 28.97,32.12 28.97,33 ; R8.2 28.97,33
  Bottom Layer w0.203: v1(18.86,44.45) 18.11,45.2 15.1,45.2 14.804,44.904 14.804,44.03 15.23,43.604 15.45,43.604 16.404,42.65 16.404,42.15 17.039,41.515 17.039,40.539 16.21,39.71 16.21,36.739 17.217,35.732 20.759,35.732 23.091,33.4 26.424,33.4 26.824,33 v2(27.8,33)
FPGA_GCLK: U1.20 U3.18 | length 7.9
  Top Layer w0.203: U1.20 20.5,34.639 19.375,35.764 19.375,37.175 20.55,38.35 U3.18
FPGA_MINH: U1.19 U3.9 | length 15.9
  Top Layer w0.203: v2(17.25,44) 18.1,44 18.85,43.25 U3.9 ; v1(20.2,36.8) 20.2,35.9 21,35.1 U1.19
  Bottom Layer w0.203: v2(17.25,44) 17.25,43.046 18.095,42.201 18.095,40.091 20.2,37.986 v1(20.2,36.8)
FPGA_RST: U1.44 U3.26 | length 38.4
  Top Layer w0.203: U1.44 22,24.435 22.335,24.1 23.337,24.1 25.786,21.651 28.248,21.651 v1(29.197,22.6) ; U3.26 24.255,40.195 26.211,40.195 v1(26.655,39.75)
  Bottom Layer w0.203: v1(26.655,39.75) 29.85,39.75 35.756,33.844 35.756,29.953 30.947,25.144 29.944,25.144 29.197,24.397 v1(29.197,22.6)
GND: C1.1 C2.1 C3.1 C4.1 C5.1 C6.2 C7.1 C8.1 C9.1 C10.1 C11.1 C12.2 C13.2 C14.1 C15.1 C16.1 C17.1 C18.1 C19.1 C20.2 C21.2 C22.1 C23.1 C24.2 C25.1 C26.2 C27.2 C29.1 C30.1 J2.1 J4.1 J5.2 J6.3 J6.5 J6.9 J9.1 J11.4 MH1.1 MH2.1 MH3.1 MH4.1 Q1.2 Q2.2 Q3.2 Q4.2 R2.1 R5.1 R8.1 R11.1 R14.1 R15.1 R20.1 R24.1 R26.2 R27.1 RF1.6 S1.3 S1.4 S1.5 S2.SHD U1.49 U2.3 U2.8 U2.11 U2.13 U3.4 U3.16 U3.31 U3.33 U4.2 U5.A2 U5.B1 U6.1 U7.1 U8.3 U9.1 | length 29
  Top Layer w0.152: C30.1 15.485,39.14 R26.2 ; v1(30.2,64.6) 29.915,64.885 U5.A2 30.15,66 30.235,66 U5.B1
  Top Layer w0.203: R14.1 8.365,9.625 C24.2 ; v1(9.817,24.083) Q1.2 ; v3(17.5,38.3) 17.949,38.3 C26.2 18.375,39.075 19.05,39.75 U3.16 ; U3.4 22.05,45.39 C21.2 22.66,46 v3(23,46) ; U3.31 25.31,42.75 C20.2 ; C27.2 v3(24.66,38.749) ; v1(27.264,26.96) J5.2@29.05,26.96 ; C18.1 v1(29.197,45.5) ; C25.1 30.267,12.375 R15.1 ; R8.1 v1(31.344,33.556) ; C16.1 v1(32.7,67.8)
  Bottom Layer w0.152: J4.1 J2.1 v1(22.959,22.966)
  Bottom Layer w0.203: U2.8 19.504,21.768 U2.13 ; U2.3 20.504,21.518 U2.13 ; U2.11 21.004,21.768 U2.13 ; R11.1 25.04,22.785 C22.1 v1(25.04,20.625)
  other v1: 5.2,23.6 26,24.719 33.7,24.846 38.7,25.1 5.1,25.8 8.2,29.225 10.951,31.25 16.339,33.114 35.447,36.3 6.248,37.1 12.41,37.4 6.35,44.8 34.229,44.985 29.559,54.6 32.573,61.054 7.75,62.7 15.3,63.8
  other v2: 9.3,3.6 10.7,3.6 9.3,5.1 10.7,5.1 9.3,6.6 10.7,6.6 7.9,16.5 10,16.5 12.1,16.5 7.9,18 12.1,18 7.9,19.5 10,19.5 12.1,19.5
  other v3: 2.1,1.1 7.1,1.1 9.6,1.1 12.1,1.1 14.6,1.1 17.1,1.1 19.6,1.1 22.1,1.1 24.6,1.1 27.1,1.1 29.6,1.1 32.1,1.1 7.1,6.1 5.85,8.6 2.1,11.1 4.6,11.1 17.1,11.1 19.6,11.1 22.1,11.1 24.6,11.1 3.35,13.6 38.35,13.6 2.1,16.1 37.1,16.1 38.35,18.6 2.1,21.1 18.704,21.768 21.804,21.768 2.1,26.1 2.1,31.1 9.6,31.1 3.35,33.6 5.85,38.6 13.35,38.6 7.1,41.1 5.85,43.6 2.1,51.1 24.6,51.1 29.6,51.1 13.35,53.6 2.1,56.1 24.6,56.1 34.6,56.1 30.85,58.6 7.1,61.1 12.1,61.1 37.1,61.1 12.709,65.4 7,67.6
  other v4: 26.972,6.35 26.972,7.25 7.75,8 8.75,8 12.49,13.7 13.39,13.7 30.002,14.1 31.002,14.1 19.6,47.4 19.6,48.3 14.3,51.8 14.3,52.7
  other v5: 19.5,27 21.25,27 23,27 19.5,28.75 23,28.75 19.5,30.5 21.25,30.493 23,30.493 21.05,40.75 22.55,40.75 21.05,42.25 22.55,42.25
  other v6: 18.7,16.525 20.3,16.525 13.3,24.2 14.4,24.2
  other v7: 38.88,37.161 26.56,43.86 38.5,49.664 38.4,55.328
  other v8: 21.25,28.75
MIC_DET: C30.2 R25.2 R26.1 U3.14 | length 52.4
  Top Layer w0.203: v1(12.9,40.4) 13.24,40.06 C30.2 15.485,40.06 R26.1 17.984,40.075 18.659,40.75 U3.14 ; R25.2 27.875,64.16 v1(27.9,64.135)
  Bottom Layer w0.203: v1(12.9,40.4) 10.696,38.196 10.15,38.196 10.146,38.2 9.6,38.2 7.823,39.977 7.823,43.427 8.896,44.5 10.788,44.5 12.414,46.126 12.645,46.126 12.794,46.275 12.794,47.578 17.816,52.6 24.789,52.6 27.9,55.711 v1(27.9,64.135)
MISO: J5.8 RF1.8 U1.14 U3.12 | length 43.1
  Top Layer w0.203: RF1.8 9.272,48.342 9.272,45.568 13.34,41.5 15.1,41.5 v2(15.8,42.2) 17.347,42.2 17.397,42.25 17.753,41.894 18.706,41.894 18.85,41.75 U3.12 ; U1.14 23.5,32.7 23.9,33.1 25.2,33.1 25.85,32.45 25.85,31.81 26.89,30.77 v1(26.97,30.77) J5.8
  Bottom Layer w0.203: v2(15.8,42.2) 15.4,41.8 15.4,36.543 16.922,35.021 20.465,35.021 22.93,32.556 25.68,32.556 26.97,31.266 v1(26.97,30.77)
MOSI: J5.7 R9.2 RF1.9 U1.17 | length 58.9
  Top Layer w0.203: RF1.9 8.621,48.239 8.621,45.679 13.3,41 16.1,41 v2(16.4,41.3) 17.075,41.3 17.2,41.175 R9.2 ; U1.17 22,33.4 22.944,34.344 29.049,34.344 29.345,34.64 32.594,34.64 34.613,32.621 v1@34.613,30.788 ; J5.7 v1@34.595,30.77
  Bottom Layer w0.203: v2(16.4,41.3) 15.854,40.754 15.854,36.592 17.069,35.376 20.612,35.376 23.077,32.911 25.827,32.911 26.539,32.2 27.854,32.2 28.21,32.556 32.247,32.556 34.003,30.8 v1(34.6,30.8)
MOSI': R9.1 U3.13 | length 1.2
  Top Layer w0.203: R9.1 U3.13
NetC28_1: C28.1 R19.1 R20.2 U5.B2 | length 3.2
  Top Layer w0.152: C28.1 27.875,66.24 R20.2 28.91,66.25 U5.B2
  Top Layer w0.203: C28.1 27.86,67.235 R19.1
NetC28_2: C28.2 J11.1 R21.2 R25.1 | length 3.9
  Top Layer w0.203: J11.1 24.179,66.225 R21.2 C28.2 26.94,65.115 R25.1
NetD1_A: D1.1 R4.1 | length 1.1
  Top Layer w0.203: R4.1@7.284,22.204 D1.1@8.349,22.204
NetD1_C: D1.2 Q1.3 | length 2.3
  Top Layer w0.203: D1.2 D1.2@9.333,22.204 ; D1.2@9.233,22.104 D1.2@9.333,22.204 ; Q1.3 11.184,22.204 D1.2@9.333,22.204
NetJ1_1: J1.1 J2.2 U2.10 | length 7.6
  Bottom Layer w0.203: U2.10 20.504,23.004 20.7,23.2 21.8,23.2 22.777,22.223 23.549,22.223 23.716,22.389 23.716,23.687 23.478,23.925 J1.1 22.05,24.875 J2.2
NetJ3_1: J3.1 J4.2 U2.9 | length 2.7
  Bottom Layer w0.203: U2.9 20.004,23.921 J3.1 20.05,23.925 J4.2
NetJ8_1: J8.1 J10.1
  other v1: 7.877,46.8 10.131,46.8
  other v2: 12.1,46.8 32.1,46.8 12.1,48.3 12.1,49.9 27.9,49.9 30,49.9 9.3,59.76 10.7,59.76 29.3,59.76 30.7,59.76 9.3,61.26 10.7,61.26 29.3,61.26 30.7,61.26 9.3,62.76 10.7,62.76 29.3,62.76 30.7,62.76
NetJ11_2: J11.2 J11.3 R22.2 | length 28.6
  Top Layer w0.75: J11.2 14.5,59.8 14.1,59.4 14.1,55.9 15.55,54.45 R22.2 25,54.45 26.6,56.05 26.6,62.6 25.7,63.5 J11.3
NetL1_1: L1.1 U2.2
NetLS1_1: LS1.1 U6.3 U6.6 U6.7 U6.8
NetLS1_2: LS1.2 U7.3 U7.6 U7.7 U7.8
NetQ2_3: Q2.3 R12.1 U6.2 U6.5 | length 20.4
  Top Layer w0.203: Q2.3 9.59,13.55 9.64,13.5 ; U6.5 11.09,11.075 11.265,10.9 12.34,10.9 12.59,10.65 R12.1@12.59,10.309 ; U6.2 11.09,14.15 10.79,14.45 9.99,14.45 9.64,14.1 9.64,13.5 ; R12.1 R12.1@12.59,10.309 ; 9.64,13.5 9.64,7.61 10.004,7.246 13.242,7.246 13.44,7.444 13.44,9.975 13.24,10.175 12.64,10.175 12.64,10.259 R12.1@12.59,10.309
NetQ3_3: Q3.3 R13.1 U7.2 U7.5 | length 21
  Top Layer w0.203: R13.1 R13.1@26.092,11.791 ; U7.2 27.592,7.95 27.892,7.65 28.692,7.65 29.042,8 29.042,8.6 ; U7.5 27.592,11.025 27.417,11.2 26.342,11.2 26.092,11.45 R13.1@26.092,11.791 ; Q3.3 29.092,8.55 29.042,8.6 ; R13.1@26.092,11.791 26.042,11.841 26.042,11.925 25.442,11.925 25.242,12.125 25.242,14.672 25.82,15.25 28.671,15.25 29.042,14.879 29.042,8.6
NetQ4_3: Q4.3 R23.1 U9.2 U9.5 | length 18.9
  Top Layer w0.203: U9.2 13.65,50.4 13.5,50.25 13.5,49.254 13.7,49.054 14.45,49.054 ; Q4.3 14.45,49.054 ; U9.5 16.65,50.4 16.846,50.4 16.946,50.5 16.946,51.246 17.5,51.8 R23.1 18.725,52.225 19,52.5 20.2,52.5 20.4,52.3 20.4,49.3 20.154,49.054 16.7,49.054 14.45,49.054
NetR1_1: R1.1 U2.7 | length 0.9
  Bottom Layer w0.203: R1.1 19.004,23.534 U2.7 U2.7@19.019,22.673
NetR2_2: R2.2 S2.1 U3.2 | length 19.3
  Top Layer w0.203: U3.2 23.05,44.35 24.2,45.5 24.2,47.546 25.6,48.946 25.6,51.511 26.235,52.146 27.465,52.146 28.339,53.02 28.339,55.189 29.625,56.475 R2.2 31.025,56.75 S2.1 S2.1@32.8,56.75
NetR5_2: R5.2 S2.T U3.30 | length 25.5
  Top Layer w0.203: U3.30 26.56,42.25 27.488,43.178 27.488,44.097 27.841,44.45 29.615,44.45 30,44.835 30,45.515 30.485,46 34.5,46 35,46.5 35,53.75 34.5,54.25 32.8,54.25 S2.T 31.025,53.75 R5.2
NetR22_1: R22.1 U9.3 U9.6 U9.7 U9.8
NetR27_2: R27.2 S2.4 U3.1 | length 14.2
  Top Layer w0.203: U3.1 23.55,44.21 24.66,45.32 24.66,47.2 26.235,48.775 R27.2 30.866,50.116 31.5,50.75 S2.4 S2.4@32.8,50.75
NetRF1_1: RF1.1
NetRF1_2: RF1.2
NRST: J6.10 R3.1 S1.1 U3.3 | length 38
  Top Layer w0.203: U3.3 22.55,44.45 23.7,45.6 23.7,51.14 25.31,52.75 v1(27.215,52.75) ; J6.10 v2(30.971,43.54) 30.971,44.924 R3.1 ; S1.1 37.485,39.843 v1(38.264,39.064)
  Bottom Layer w0.203: v1(27.215,52.75) 27.206,52.741 27.206,46.275 28.585,44.896 29.615,44.896 v2(30.971,43.54) 35.447,39.064 v1(38.264,39.064)
P_RST: J5.6 R7.1 U1.8 | length 29.9
  Top Layer w0.203: v1(14,44) 14.121,44 R7.1 ; U1.8 25.7,29.5 ; v1(25.7,31) 25.7,29.5 ; J5.6 27.063,29.5 25.7,29.5
  Bottom Layer w0.203: v1(14,44) 14.544,43.456 14.544,36.393 16.627,34.31 20.17,34.31 22.68,31.8 24.9,31.8 v1(25.7,31)
P_SCK: J5.9 RF1.7 U1.15 U3.11 | length 53.6
  Top Layer w0.203: RF1.7 10.8,44.7 13.6,41.9 14.6,41.9 15.2,42.5 v2(15.2,43) 17.15,43 17.9,42.25 U3.11 ; U1.15 23,32.8 23.7,33.5 26.01,33.5 26.7,32.81 26.7,31.955 27.249,31.406 v2@30.866,31.406 ; v2@30.88,31.42 31.5,32.04 J5.9
  Bottom Layer w0.203: v2(15.2,43) 15.2,42.5 14.9,42.2 14.9,36.54 16.775,34.665 20.318,34.665 22.783,32.2 25.4,32.2 26.366,31.234 26.366,30.434 26.8,30 27.456,30 28.856,31.4 v2(30.9,31.4)
PDMC: U1.48 U5.A1 U8.1 | length 98.6
  Top Layer w0.152: U5.A1 31.035,65.765 v1(31.5,65.3)
  Top Layer w0.203: U1.48 24,24.6 24.804,23.796 34.136,23.796 37.1,26.76 37.1,37.489 37.096,37.493 37.096,37.887 35.135,39.848 35.135,44.885 35.75,45.5 35.75,59.26 31.844,63.166 31.844,64.956 v1(31.5,65.3)
  Bottom Layer w0.203: U8.1 10.75,64.15 11.006,63.894 12.407,63.894 12.947,63.353 12.947,56.45 15.653,53.744 24.857,53.744 26.779,55.667 26.779,64.779 27.3,65.3 v1(31.5,65.3)
PDMD: U1.47 U5.C1 U8.5 | length 104.8
  Top Layer w0.152: U5.C1 v1@31.465,66.735 ; v1(31.4,66.8) v1@31.465,66.735 ; v1@31.5,66.7 v1@31.465,66.735 ; v1@31.5,66.735 v1@31.465,66.735
  Top Layer w0.203: U1.47 23.5,24.597 24.657,23.44 35.19,23.44 37.79,26.04 37.79,38.193 35.873,40.11 35.873,44.623 36.5,45.25 36.5,59.806 32.8,63.506 32.8,65.435 v1@31.5,66.735
  Bottom Layer w0.203: U8.5 10.75,67.535 10.965,67.75 12.225,67.75 13.688,66.287 13.688,56.713 15.937,54.463 24.363,54.463 26,56.1 26,65 27.8,66.8 v1(31.4,66.8)
PDMI: U1.46
PWMA: Q4.1 R24.2 U1.23 | length 33.1
  Top Layer w0.203: v1(10.4,38.8) 10.4,37.167 11.423,36.144 16.356,36.144 18.7,33.8 18.7,33.1 19,32.8 U1.23 ; R24.2 12.9,47.7 v1(13.4,47.2) 13.45,47.25 Q4.1 Q4.1@16.2,47.2
  Bottom Layer w0.203: v1(10.4,38.8) 9.8,38.8 8.3,40.3 8.3,43.4 9,44.1 10.891,44.1 12.562,45.77 12.793,45.77 13.15,46.127 13.15,46.358 13.4,46.609 v1(13.4,47.2)
PWML: Q2.1 R14.2 U1.42 | length 25.2
  Top Layer w0.203: R14.2 6.94,11.5 7.29,11.85 Q2.1 7.69,14.25 8.319,14.879 13.791,14.879 15.176,16.264 15.176,20.576 17.488,22.887 19.422,22.887 21,24.465 U1.42
PWMR: Q3.1 R15.2 U1.43 | length 36.8
  Top Layer w0.203: U1.43 21.5,24.387 19.593,22.48 17.584,22.48 15.7,20.597 15.7,15.82 16.77,14.75 24.442,14.75 25.442,15.75 31.422,15.75 32.5,14.672 32.5,11.7 32.225,11.425 R15.2 31.742,10.5 31.492,10.25 Q3.1
RADIO_CS: RF1.10 U3.19 | length 46.7
  Top Layer w0.203: RF1.10 7,48.59 7,46.3 7.203,46.097 7.7,46.097 11.45,42.347 v1(11.45,41.7) ; U3.19 21.05,38.2 21.99,37.26 21.99,35.835 22.425,35.4 26.8,35.4 v1(28.4,37)
  Bottom Layer w0.203: v1(11.45,41.7) 11.45,42.647 13.151,44.348 13.382,44.348 14.634,45.6 18.75,45.6 19.464,44.886 19.464,44.2 18.929,43.665 18.929,40.263 21.616,37.575 25.725,37.575 27,36.3 27.7,36.3 v1(28.4,37)
RADIO_SHD: RF1.11 U3.20 | length 43.5
  Top Layer w0.203: RF1.11 5.72,46.731 6.824,45.627 7.473,45.627 10.3,42.8 v1(10.3,42) ; U3.20 21.55,38.35 22.375,37.525 22.375,36.387 22.887,35.875 26.075,35.875 v1(27.3,37.1)
  Bottom Layer w0.203: v1(10.3,42) 13.004,44.704 13.234,44.704 14.216,45.686 14.216,45.916 14.3,46 18.853,46 19.819,45.034 19.819,44.053 19.284,43.518 19.284,40.41 21.694,38 26.4,38 v1(27.3,37.1)
RX_COMPLETE: R17.1 RF1.3 U1.37 U3.28 | length 64.7
  Top Layer w0.203: v1(9.4,40.9) 8.26,39.76 RF1.3 8.26,32.1 7.285,31.125 R17.1 4.746,31.125 3.599,29.978 3.599,21.651 4.651,20.599 14.349,20.599 16.2,22.45 16.2,24.316 16.475,24.591 18.342,24.591 18.5,24.75 U1.37 ; U3.28 25.504,41.25 v1(25.6,41.154)
  Bottom Layer w0.203: v1(9.4,40.9) 9.4,41.954 10.346,42.9 10.697,42.9 12.856,45.059 13.087,45.059 13.861,45.833 13.861,46.064 14.153,46.356 19.4,46.356 24.602,41.154 v1(25.6,41.154)
SWC/TX: J6.4 U3.25 | length 5.4
  Top Layer w0.203: U3.25 25.55,39.75 26.154,39.146 27,39.146 27.604,39.75 29.03,39.75 J6.4
SWD/RX: J6.2 U3.23 | length 10.2
  Top Layer w0.203: U3.23 23.05,36.538 23.357,36.231 25.231,36.231 26.007,37.008 26.007,37.992 26.6,38.585 J6.2@29.05,38.585
TX_READY: R18.1 RF1.4 U1.35 U3.29 | length 68.3
  Top Layer w0.203: v1(10.5,40.4) 9.53,39.43 RF1.4 9.53,32.13 7.575,30.175 R18.1 4.646,30.175 4.2,29.729 4.2,21.9 4.9,21.2 14.1,21.2 15.75,22.85 15.75,25.25 17,26.5 U1.35 ; U3.29 24.208,41.758 26.242,41.758 v1(26.6,41.4)
  Bottom Layer w0.203: v1(10.5,40.4) 10.396,40.296 9.15,40.296 8.796,40.65 8.796,42.104 8.789,42.111 9.933,43.256 10.55,43.256 12.709,45.415 12.94,45.415 13.505,45.98 13.505,46.211 14.005,46.711 19.547,46.711 24.459,41.8 26.2,41.8 v1(26.6,41.4)
USB_N: U3.21
USB_P: U3.22
VANA_1V8: C19.2 C21.1 FB2.1 U3.5 | length 5.3
  Top Layer w0.203: U3.5 21.55,45.39 C21.1 21.34,46.67 FB2.1 21.31,47.76 C19.2 ; C19.2@22.225,48.725 C19.2@22.25,48.75
VAUX_1V8: C4.2 C7.2 C8.2 C9.2 C15.2 C16.2 C17.2 J5.1 R16.2 R19.2 R21.1 U1.1 U1.22 U1.24 U1.33 U2.6 U5.C2 U8.2 U8.4 | length 23.9
  Top Layer w0.152: v1(26.89,67.175) 26.89,67.634 27.182,67.927 28.715,67.927 28.875,67.767 R19.2 29.615,67.3 ; U5.C2 29.915,67 29.615,67.3 ; C16.2 30.115,67.8 29.615,67.3
  Top Layer w0.203: v1(16.75,27.5) U1.33 ; v1(17.85,33.35) 18.5,32.7 U1.24 ; U1.22 v1(19.5,33.35) ; U1.1 v1(25.8,26) ; R21.1 v1(26.89,67.175) ; J5.1 v1(34.86,26.96) 35,27.1 R16.2
  Bottom Layer w0.152: v1(10,68) 10.05,67.95 U8.4
  Bottom Layer w0.203: C17.2 10.05,63.984 U8.2 U8.4 ; v1(16.75,27.5) C9.2 ; v1(17.85,33.35) 18.5,32.7 C15.2 ; C7.2 v1(19.5,33.35) ; C8.2 25.524,26.8 25.8,26.524 v1(25.8,26)
  other v1: 14.1,18 14.1,19
VBAT_SENS: C22.2 R10.1 R11.2 U3.15 | length 45.4
  Top Layer w0.203: v1@16.75,39.4 v1(16.977,39.4) 18,39.4 18.85,40.25 U3.15
  Bottom Layer w0.203: v1(16.977,39.4) 16.6,39.023 16.6,36.852 17.364,36.088 20.907,36.088 23.094,33.9 27.6,33.9 29.432,35.732 33,35.732 35.4,33.332 35.4,30.1 30.8,25.5 28.056,25.5 27.1,24.544 R10.1 26.1,22.675 R11.2 25.96,22.785 C22.2
VIN_4V2: C1.2 C24.1 C25.2 C29.2 J1.2 J3.2 J7.1 R10.2 R12.2 R13.2 R23.2 U2.1 U2.12 U6.4 U7.4 U9.4 | length 19.3
  Top Layer w0.203: C24.1 11.715,9.225 R12.2 ; v4(19.6,50.7) 19.6,51.725 R23.2 ; R13.2 26.967,12.875 C25.2
  Bottom Layer w0.203: J3.2 20.625,25.5 22.375,25.5 J1.2 23.525,24.875 24.076,24.324 24.076,21.788 23.166,20.878 22.6,20.878 ; U2.1 22.451,20.878 22.451,21.99 21.783,22.658 U2.12 ; R10.2 27.1,20.3 v2(27.9,19.5)
  other v2: 29.3,3.6 30.7,3.6 29.3,5.1 30.7,5.1 29.3,6.6 30.7,6.6 27.9,16.5 30,16.5 32.1,16.5 27.9,18 32.1,18 30,19.5 32.1,19.5
  other v4: 11,8 12,8 26.752,14.1 27.752,14.1 19.6,49.8
VPLL_1V2: C10.2 C11.2 FB1.2 U1.29 | length 5.1
  Top Layer w0.203: FB1.2@15.76,30 v1(16.75,30) 17.25,29.5 U1.29
  Top Layer w0.254: C10.2 15.75,31.25 FB1.2 FB1.2@15.76,30
  Bottom Layer w0.203: v1(16.75,30) C11.2
VSYS_1V2: C5.2 C12.1 C13.1 C14.2 FB1.1 Q1.1 U1.5 U1.30 U4.5 | length 14.2
  Top Layer w0.203: Q1.1 12.013,23.387 12.2,23.2 15.085,23.2 15.3,23.415 15.3,27.1 v4(15.6,27.4) ; v1(16.75,29) U1.30 ; U1.5 v1(25.8,28)
  Top Layer w0.254: C14.2 14.69,29.01 FB1.1 FB1.1@15.76,29
  Bottom Layer w0.203: v1(16.75,29) C13.1 ; C12.1 v1(25.8,28)
VSYS_1V8: C2.2 C3.2 C6.1 C18.2 C20.1 C23.2 C26.1 C27.1 FB2.2 J6.1 L1.2 R1.2 R3.2 R4.2 R17.2 R18.2 RF1.5 S2.C U2.5 U3.17 U3.24 U3.32 U4.1 U4.3 | length 23.6
  Top Layer w0.203: v1(5.231,22.204) R4.2 ; R18.2 v1(6.459,29.225) ; R17.2 v1(6.484,32.075) ; v1(8.538,24.191) 9.575,25.228 U4.3 ; v3(18.451,37.5) C26.1 19.375,38.075 20.05,38.75 U3.17 ; FB2.2 22.55,46.7 v3(23.05,47.2) ; U3.24 23.55,37.99 C27.1 v1(23.74,36.835) ; U3.32 24.55,43.25 24.9,43.6 25.24,43.6 C20.1 25.5,45.1 C18.2 v3(25.9,46.8) ; R3.2 v1(32.8,45.1) ; S2.C@32.8,49.25 32.804,49.254 v1(33.7,49.254) ; J6.1 v1(34.7,38.46)
  Top Layer w0.512: RF1.5 10.951,34.749 v6(12.601,34.749) 14.088,34.749 C6.1
  Bottom Layer w0.203: v1(16.977,23.563) R1.2
  other v1: 17.2,16.5 18.5,19.8 5.55,27.35 6.35,27.35
pads on no net: FD1.0 FD2.0 FD3.0 J5.3 J6.6 J6.7 J6.8 J11.5 J11.6 S1.2 S2.2 S2.3 S2.MNT U1.2 U1.3 U1.4 U1.6 U1.9 U1.10 U1.11 U1.12 U1.13 U1.21 U1.25 U1.26 U1.27 U1.28 U1.31 U1.32 U1.34 U1.36 U1.38 U1.39 U1.40 U1.41 U1.45 U4.4 U8.0
copper on no net:
  other v1: 32,22.6

## Polygon pours and split planes (outlines as drawn)
GND on Bottom Layer "GND_L04_P102" (solid, remove dead copper, pour order 102): 0,0 0,69 40,69 40,0
GND on Bottom Layer "GND_L04_P092" (solid, pour order 92): 16.626,68.2 6.2,68.2 6.2,61.8 16.574,61.8
VIN_4V2 on Bottom Layer "VIN_4V2_L04_P064" (solid, pour order 64): 33.4,21.2 34,21.2 36.127,23.327 36.127,33.857 20.984,49 20.254,49 18.373,49 18.373,52 19.373,53 20.781,53 38.112,35.669 38.112,20.212 35.4,17.5 35.4,7.15 31.25,3 10.5,3 10.5,8.75 25.75,8.75 25.75,14.5 28.25,14.5 28.25,13 32.25,13 32.25,15.9 23.1,15.9 23.1,19.9 22.4,20.6 21.3,20.6 21.3,21.2
no net on Bottom Layer "Bottom Layer-No Net" (solid, pour order 103): 7.4,46.3
GND on Bottom Layer "GND_L04_P066" (solid, pour order 66): 19.15,22.3 17.75,23.7 8.7,23.7 7.3,22.3 7.3,15.9 13.1,15.9 13.1,21.2 18.9,21.2 22.7,21.2 22.7,22.3
VAUX_1V8 on Bottom Layer "VAUX_1V8_L04_P086" (solid, pour order 86): 13.275,15.941 13.1,15.766 7.459,15.766 7.2,16.025 7.2,22.4 10.1,25.3 26.3,25.3 26.3,28.5 20.7,34.1 14.6,34.1 6,25.5 6,16.042 7.342,14.7 13.7,14.7 14.9,15.9 14.9,17.3 14.8,17.4 14.8,18.925 16.225,20.35 18.9,20.35 19.15,20.6 19.15,21.15 18.85,21.15 18.85,21 13.275,21
GND on Bottom Layer "GND_L04_P080" (solid, pour order 80): 18.1,31.8 18.1,27 18.2,26.9 22.564,26.9 23.064,26.4 24.2,26.4 24.2,31.8
VSYS_1V2 on Bottom Layer "Bottom Layer-VSYS_1V2" (solid, pour order 94): 26.5,27.5 26.5,29 19.342,29 18.842,29.5 14.9,29.5 14.9,26.5 16,26.5 16.4,26.9 16.4,27.854 18.707,27.854 19.061,27.5
VSYS_1V8 on Bottom Layer "VSYS_1V8_L04_P082" (solid, pour order 82): 14.9,15.9 13.7,14.7 7.342,14.7 6,16.042 6,25.5 7.3,26.8 7.3,32.9 3.4,32.9 3.4,14.9 6.4,11.9 19.3,11.9 19.3,15.725 19.1,15.925 18.1,15.925 18,16.025 18,18.525 19.7,20.225 19.7,21.225 19.3,21.225 19.3,20.425 19.1,20.225 16.125,20.225 14.9,19
NetL1_1 on Bottom Layer "NETL1_1_L04_P038" (solid, pour order 38): 21.15,21.15 21.15,20.675 21.325,20.5 22.401,20.5 22.9,20 22.9,13.625 20.375,13.625 20.375,15.5 21.8,16.925 21.8,19.425 20.875,20.35 20.875,21.15
GND on Bottom Layer "GND_L04_P078" (solid, pour order 78): 18,16.025 18,19.175 20.35,19.175 20.5,19.325 20.5,20.125 20.3,20.325 20.3,21.225 20.7,21.225 20.7,20.425 21.7,19.425 21.7,16.025
no net on Bottom Layer "Top Layer-No Net 3" (solid, pour order 12): 20.42,14.978
no net on Bottom Layer "Top Layer-No Net 2" (solid, pour order 52): 14.804,20.117
no net on Bottom Layer "Top Layer-No Net 1" (solid, pour order 56): 14.804,22.378
no net on Bottom Layer "Top Layer-No Net" (solid, pour order 58): 16.204,22.332
GND on Top Layer "GND_L01_P101" (solid, remove dead copper, pour order 101): 0,0 0,69 40,69 40,0
GND on Top Layer "GND_L01_P098" (solid, pour order 98): 12.9,26.9 12.9,28.15 13.45,28.7 13.45,29.925 14.45,30.925 14.45,32.45 12.8,32.45 10.15,29.8 10.15,26.9 9.075,26.9 8.575,26.4 7,26.4 7,25 8.6,25 8.6,25.7 9.1,26.2 10.15,26.2 12.75,23.6 14.925,23.6 14.925,26.4 13.4,26.4
VSYS_1V8 on Top Layer "VSYS_1V8_L01_P090" (solid, pour order 90): 8.4,26.75 8.8,27.15 10.15,27.15 10.15,27.85 8.65,27.85 8.5,28 5.05,28 5.05,26.75
VSYS_1V2 on Top Layer "VSYS_1V2_L01_P088" (solid, pour order 88): 11.75,27.15 11.75,27.85 13.25,27.85 13.65,28.25 13.65,30.15 16.2,30.15 16.2,26.75 13.5,26.75 13.1,27.15
VSYS_1V8 on Power "VSYS_1V8_L03_P110" (solid, pour order 110): 0,0 0,69 40,69 40,0
VAUX_1V8 on Power "VAUX_1V8_L03_P108" (solid, pour order 108): 12.8,30.7 0,43.5 0,68.6 28.709,68.6 28.709,49.838 28.748,49.8 8.227,49.8 8.227,38.004 13.366,32.866 14.6,34.1 20.7,34.1 26.3,28.5 36.1,28.5 36.1,25.3 17,25.3 17,17 12.8,17
NetJ8_1 on Power "NETJ8_1_L03_P104" (solid, pour order 104): 27.4,46.3 27.4,47.6 21.1,47.6 21.1,46.3 7.4,46.3 7.4,63.2 12.6,63.2 12.6,50.4 27.4,50.4 27.4,63.3 32.6,63.3 32.6,46.3
VSYS_1V2 on Power "VSYS_1V2_L03_P106" (solid, pour order 106): 14.435,26.5 14.435,29.5 18.671,29.5 19.371,28.8 26.469,28.8 26.469,27.2 18.4,27.2 17.7,26.5
GND on Ground "GND_L02_P100" (solid, pour order 100): 0,0 0,69 40,69 40,0

## Keep-outs
Keep-Out Layer:
  lines w0.2: 0,0 0,69 16.704,69 16.704,62.2 15.704,62.2 15.704,60.8 16.704,60.8 16.704,56 23.304,56 23.304,60.8 24.304,60.8 24.304,62.2 23.304,62.2 23.304,69 40,69 40,0 0,0

## Other copper
Top Layer:
  region net GND: 27.372,7.628 27.121,7.879 27.121,8.8 26.752,8.8 26.752,7.83 26.572,7.65 26.572,5.95 27.372,5.95
  region net GND: 11.54,13.3 11.54,14.1 13.79,14.1 13.79,13.3
  region net VIN_4V2: 28.442,14.59 28.432,14.6 26.182,14.6 26.182,13.735 26.742,13.176 26.742,11.5 27.542,11.5 28.042,11 28.042,10 28.442,10
  region net GND: 29.442,14.59 29.432,14.6 31.432,14.6 31.432,13.6 30.932,13.1 30.942,12.85 30.942,11.5 30.642,11.5 29.942,10.8 29.942,9.7 29.442,9.7
  region net NetLS1_1: 13.875,13.1 16.1,10.875 16.1,6.3 14.1,6.3 14.1,10.429 12.229,12.3 11.94,12.3 11.94,11.3 11.54,11.3 11.54,12.3 10.24,12.3 10.24,14.1 10.64,14.1 10.64,13.1
  region net NetLS1_2: 26.2,9 25.9,8.7 25.9,6.3 23.9,6.3 23.9,8.4 25.3,9.8 26.742,9.8 26.742,10.8 27.142,10.8 27.142,9.8 28.442,9.8 28.442,8 28.042,8 28.042,9
  region net GND: 9.24,7.51 9.25,7.5 7.25,7.5 7.25,8.5 7.75,9 7.74,9.25 7.74,10.6 8.04,10.6 8.74,11.3 8.74,12.4 9.24,12.4
  region net VIN_4V2: 10.24,7.51 10.25,7.5 12.5,7.5 12.5,8.364 11.94,8.924 11.94,10.6 11.14,10.6 10.64,11.1 10.64,12.1 10.24,12.1
  region net GND: 14.7,50.85 13.9,50.85 13.9,53.1 14.7,53.1
  region net NetR22_1: 14.9,51.246 14.9,53.4 16.5,53.4 16.5,52.6 15.7,51.8 15.7,51.25 16.65,51.25 16.65,50.85 15.7,50.85 15.7,49.55 13.95,49.55 13.95,49.95 14.9,49.95
  region: 14.9,51.246
  region net GND: 17.2,46.9 17.2,47.8 16.7,48.3 15.6,48.3 15.6,48.8 20.05,48.8 20.05,46.9
  region net VIN_4V2: 15.9,50 16.9,50 17.2,50.3 17.2,51.1 20.05,51.1 20.05,49.4 15.9,49.4
Bottom Layer:
  pour cut-out: 9.7,67.051 8.15,67.046 8.15,64.954 9.7,64.949
  region: 23.604,12.878

## Silkscreen, mask and mechanical layers (free items; w line width, h text height)
Top Overlay:
  circle w0.25: c8.7,66 r0.707
  lines w0.254: 25.3,59.5 32.1,59.5 32.1,61.8 33.3,61.8 33.3,63.7 33.1,63.7 25.3,63.7 25.3,59.5
  text "MIC" at 9.8,65.5 h1
  text "MCU" at 33.75,37.825 h1 r180
  text "FPGA" at 33.75,26.325 h1 r180
Bottom Overlay:
  lines w0.25: 3,8.306 17,8.306 17,58.306 3,58.306 3,8.306 ; 23,8.306 23,58.306 37,58.306 37,8.306 23,8.306
Top Paste:
  region: 39.47,45.455 38.395,45.455 38.395,43.78 39.47,43.78
  rectangle: 38.4,39.925 39.475,41.6
Top Solder:
  text "A" at 2.1,49.9 h10 r270
  text "Gustav Palmqvist / David Frykskog" at 11.265,1 h1
Mechanical 20:
  lines w0.2: 0,0 0,69 16.704,69 16.704,62.2 15.704,62.2 15.704,60.8 16.704,60.8 16.704,56 23.304,56 23.304,60.8 24.304,60.8 24.304,62.2 23.304,62.2 23.304,69 40,69 40,0 0,0

## Text inside footprints (layer, text, board x,y; h text height)
LS1: Top Overlay "TAPE" at 14.5,21.5 h2 r270